# Altium PCB slave-14-mc33775.PcbDoc (part 4 of 5)
Units mil, origin at the board's own origin, x right, y up, seen from the top; angles counter-clockwise.
Board outline 6512.5 x 4562.01 mil, 6 copper layers (Top Copper, Supply, Signal Layer 1, Signal Layer 2, GND, Bot Copper), stack 69.773 mil thick; 427 components, 0 nets, 1131 pads, 1672 vias.
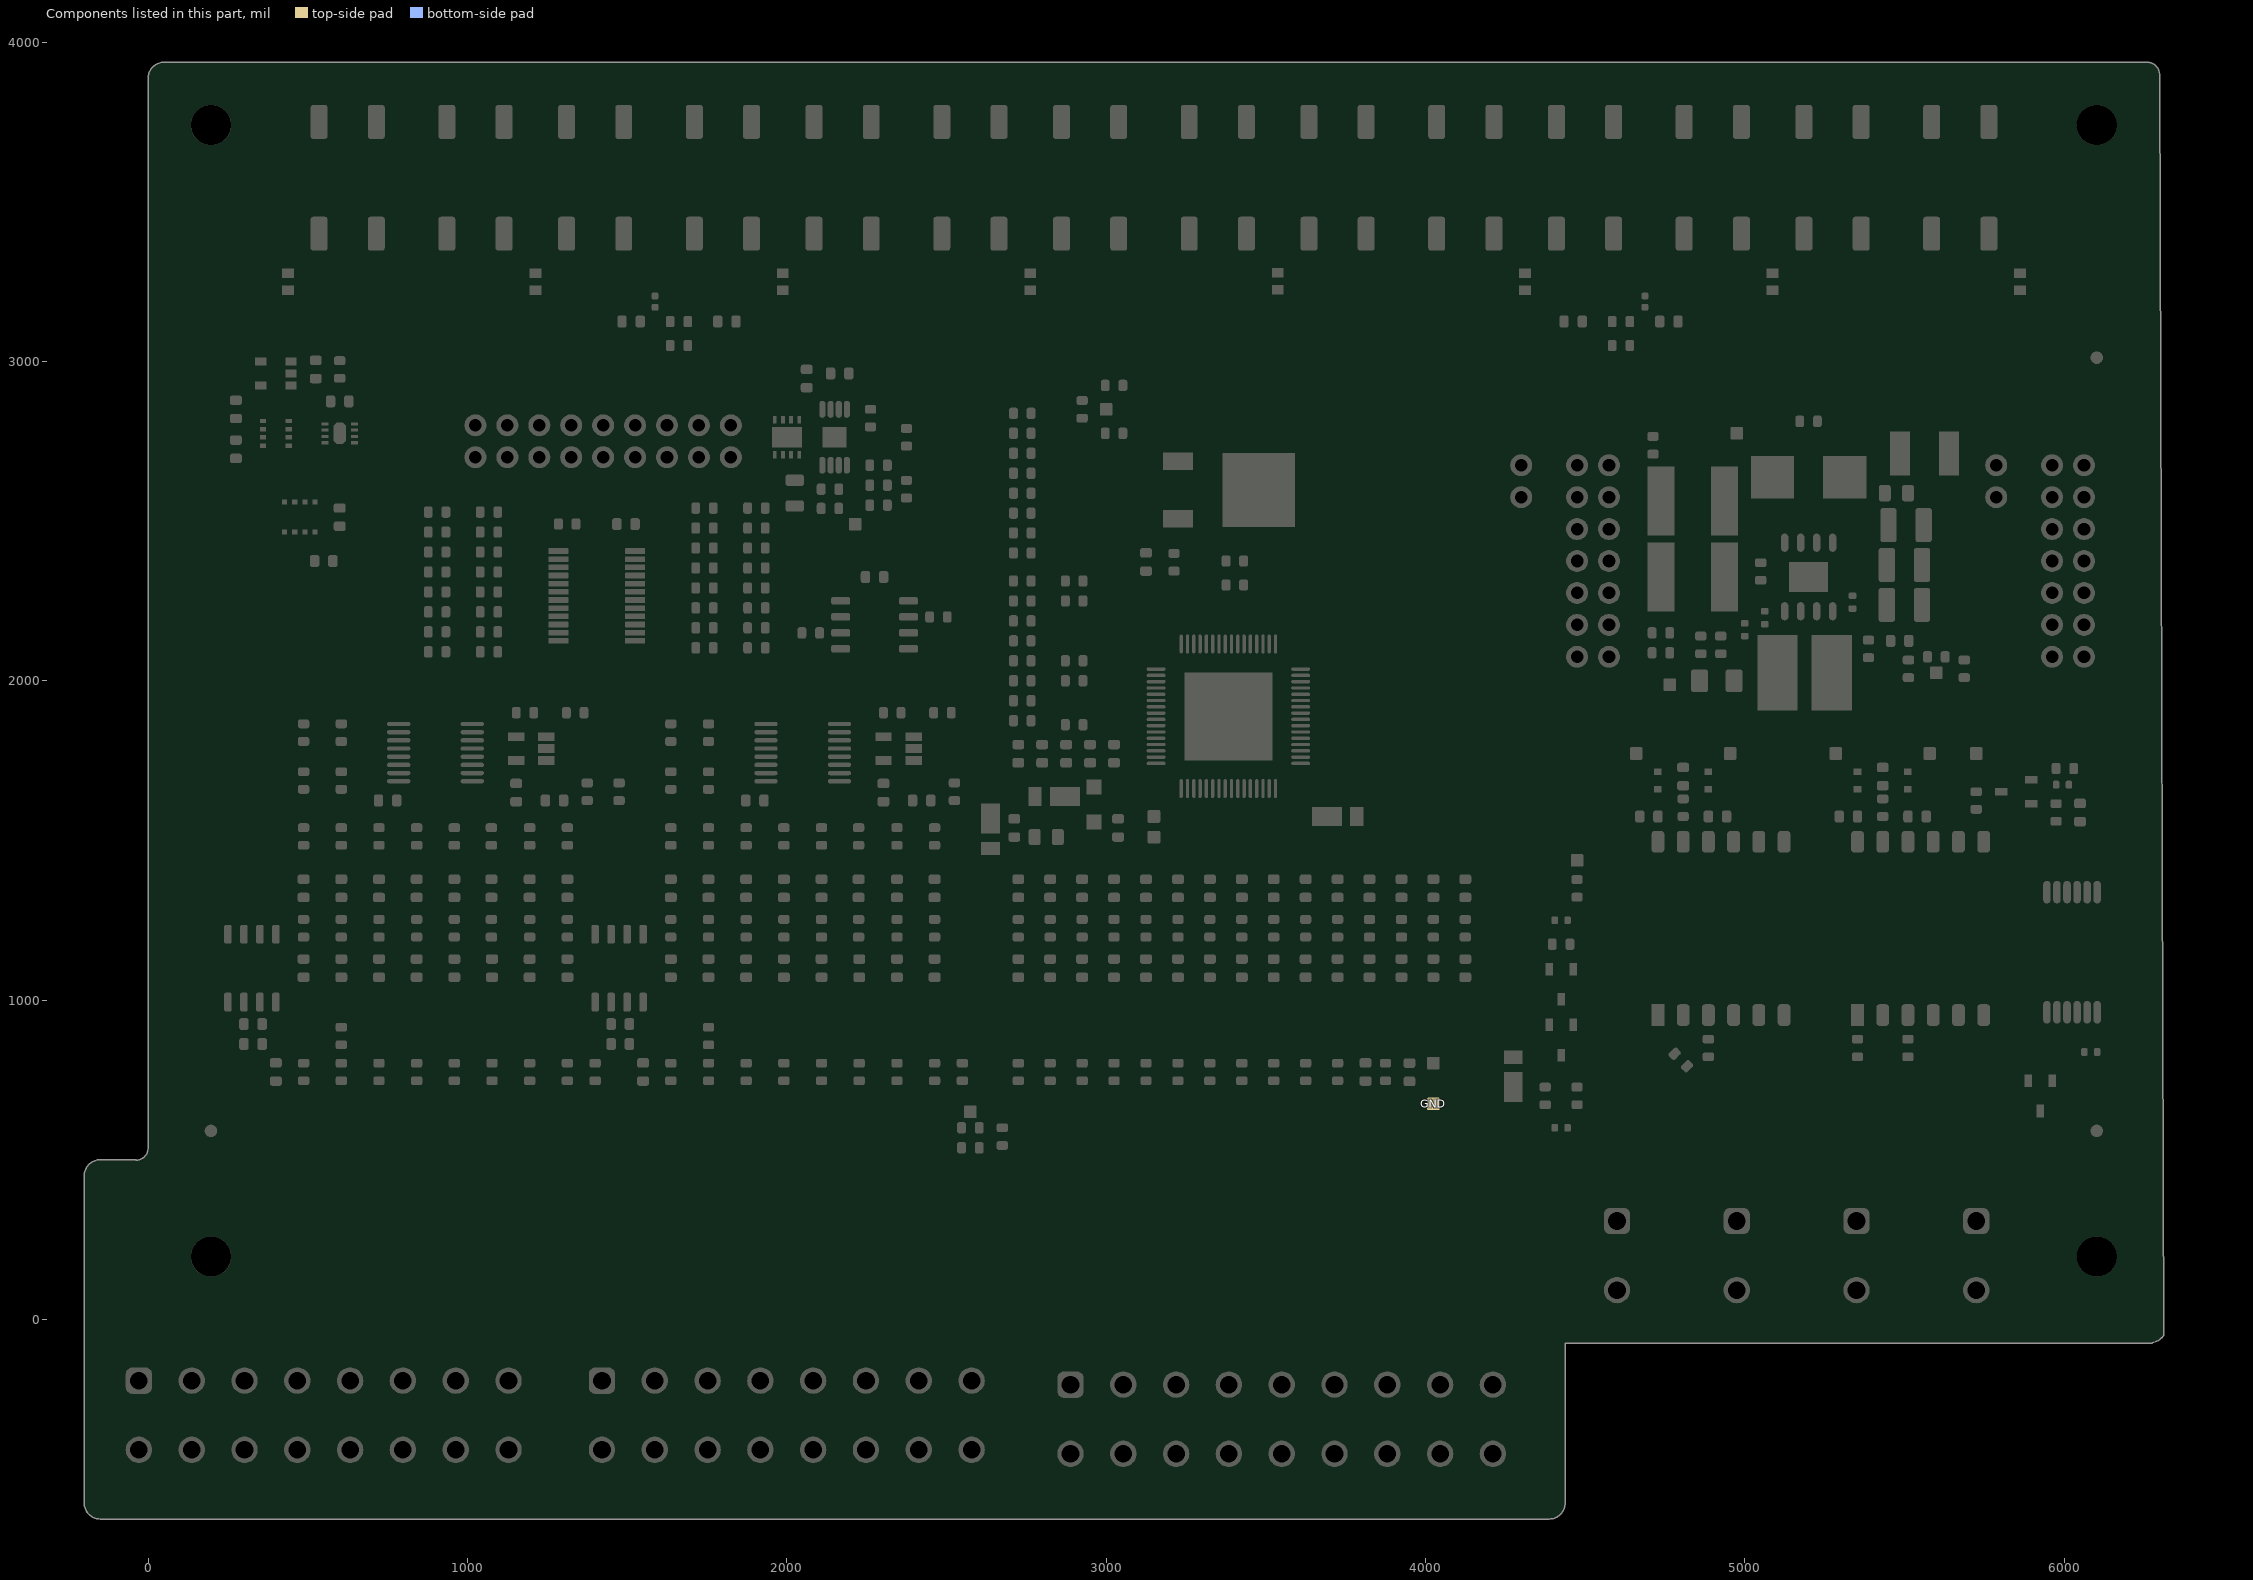
[diagram p8: the components of this part, seen from the top]

## Via types
v1: diameter 23.62, hole 15.75, Top Copper to Bot Copper, 1585 vias
v2: diameter 19.68, hole 11.81, Top Copper to Bot Copper, 87 vias

## Nets (pads, with @x,y where several pads share a name; then routed paths per layer and width w, separated by ;. In a path a pad name is that pad's centre, name@x,y a point inside that pad or via, vN(x,y) a via of type N, cw(c..) or ccw(c..) an arc to the next point about the centre after c; other vN are vias at no path point) (continued)
copper on no net: (continued)
  Signal Layer 1 w30: 750,3287.5 750,3250 v1(1012.5,2987.5) ; v1(2637.5,1412.5) 2637.5,-169.69 2888.58,-420.77 ; v1(2712.5,1637.5) 2713.52,1636.48 2726.92,1636.48 2747.31,1616.09 2747.31,1582.96 2741.27,1576.92 2741.27,1445.46 2775,1411.73 v1(2775,1162.5) 2775,886.52 v1(2825,836.52) 3055.76,605.76 3055.76,-120.72 3114.27,-179.24 3114.27,-418.95 3055.76,-418.95 3053.94,-420.77 ; v1(3025,836.52) 3025,828.56 3185.14,668.43 3274.85,668.43 3279.63,663.64 3279.63,-360.43 3219.29,-420.77 ; v1(3025,3125) 3090.19,3125 3254.58,2960.6 3876.9,2960.6 4008.55,2828.95 4008.55,2202.95 4091,2120.5 4091,1799.26 v1(4075,1783.26) ; v1(3075,3162.5) 3100.77,3162.5 3210.58,3052.69 3211.73,3052.69 3269.81,2994.6 3892.9,2994.6 4042.55,2844.95 4042.55,2217.03 4125,2134.58 v1(4125,1783.26) ; v1(3100,1575) 3222.31,1697.31 3222.31,2587.53 v1(3212.5,2597.34) ; v1(3225,836.52) 3444.98,616.53 3444.98,-360.43 3384.65,-420.77 ; v1(3225,3087.5) 3283.9,3028.6 3906.98,3028.6 4076.55,2859.03 4076.55,2231.12 4161.19,2146.48 4161.19,1802.82 4175,1789.01 v1(4175,1783.26) ; v1(3544.09,1957.78) 3600,1901.87 3600,1624.23 3490.19,1514.42 3490.19,1053.46 3425,988.27 v1(3425,836.52) 3498,763.52 3498,691.81 3557.4,632.4 3557.4,-126.3 3610.34,-179.24 3610.34,-413.36 3557.4,-413.36 3550,-420.77 ; v1(3544.09,2016.83) 3637.5,1923.43 3637.5,1761.7 3659.81,1739.39 3659.81,1023.08 3625,988.27 v1(3625,836.52) 3625,675 3681.25,618.75 3681.25,-153 3655.02,-179.24 3655.02,-264.57 3715.35,-324.91 3715.35,-420.77 ; v1(3737.5,2900) 3877.14,2760.36 v1(3877.14,1783.26) ; v1(3775,2075) v1(3775,988.04) 3775,659.22 3823.36,610.86 3820.37,607.87 3820.37,-360.43 3880.71,-420.77 ; v1(3850,2875) 3937.5,2787.5 v1(3937.5,1783.26) ; v1(3850,3300) 3850,3275 4178.55,2946.45 4178.55,2273.37 4263.19,2188.73 4263.19,1845.07 v1(4325,1783.26) ; v1(3862.5,2925) 3974.55,2812.95 3974.55,2179.49 4025,2129.04 v1(4025,1783.26) ; v1(3937.5,3087.5) 4110.55,2914.45 4110.55,2245.2 4195.19,2160.56 4195.19,1816.9 4225,1787.09 v1(4225,1783.26) ; v1(3937.5,3137.5) 4144.55,2930.45 4144.55,2259.28 4229.19,2174.64 4229.19,1830.99 4275,1785.18 v1(4275,1783.26) ; v1@3975,2125 3979.81,2120.19 3979.81,1014.8 3975,1009.99 v1(3975,988.04) 4037.5,925.54 4037.5,-127.46 3985.72,-179.24 3985.72,-412.21 4037.5,-412.21 4046.06,-420.77 ; v1(4050,3300) 4050,3125 4212.55,2962.45 4212.55,2287.45 4297.19,2202.81 4297.19,1862.99 4312.5,1847.68 4312.5,1845.76 v1(4375,1783.26) ; v1(4400,1937.5) 4400,2400 4475,2475 ; v1(4425,1783.26) 4331.19,1877.07 4331.19,2268.81 4246.55,2353.45 4246.55,2883.28 4575,3211.73 v1(4575,3300) ; v1(4481.99,1783.26) 4365.19,1900.06 4365.19,2653.46 4579.81,2868.08 4579.81,3104.81 v1(4775,3300) ; v1@4562.5,1787.5 4647.24,1872.24 4647.24,2234.74 5350,2937.5 v1(5350,3300) ; v1@4612.5,1787.5 4730.25,1905.25 4730.25,2229.48 5550,3049.23 v1(5550,3300) ; v1(4765.06,2037.5) 4765.06,2119.74 5157.82,2512.5 v1(5162.5,2512.5) ; v1(5475,2009.94) 5497.44,2009.94 5962.5,2475
  Signal Layer 2 w12: v1(512.5,2775) 513.31,2774.19 976.47,2774.19 995.11,2755.55 1469.45,2755.55 1525,2700 ; v1(725,2800) 1025.01,2800 ; v1(2625,1812.5) 2625.81,1811.69 3209.91,1811.69 3290.02,1731.58 3856.58,1731.58 3876.45,1751.45 4683.15,1751.45 4722.1,1712.5 v1(5725,1712.5) ; v1(2818.75,1937.5) 2833.72,1922.53 v1(3002.34,1922.53) ; v1(2818.75,2062.5) 2868.75,2012.5 2961.5,2012.5 2998.19,1975.81 v1(3037.5,1975.81) ; v1(3087.5,1648.19) 3199.13,1648.19 3214.75,1663.81 3922.94,1663.81 3978.58,1719.45 4137.54,1719.45 4191.66,1665.34 4687.81,1665.34 v1(4728.15,1625) ; v1(3087.5,1679.81) 3916.31,1679.81 3971.95,1735.45 4144.17,1735.45 4198.28,1681.34 4829.81,1681.34 v1(4886.15,1625) v1@4887.5,1625 ; v2(3193.36,1607.84) 3195.44,1607.84 3202.47,1600.81 3724.19,1600.81 3816.59,1508.41 4077.39,1508.41 4083.52,1514.55 5149.11,1514.55 5285.37,1650.81 5324.19,1650.81 5350,1625 v1(5353.15,1625) ; v2(3212.5,1627.84) 3728.47,1627.84 3825.76,1530.55 4068.41,1530.55 4074.41,1536.55 5136.55,1536.55 5272.81,1672.81 5333.31,1672.81 5339.31,1666.81 5469.34,1666.81 v1(5511.15,1625) ; 4475,2075 4538.31,2011.69 4775.75,2011.69 4789.87,2025.81 4967.97,2025.81 5009.65,1984.13 5485.69,1984.13 5576.56,2075 5962.5,2075 ; 4475,2175 4530.55,2230.55 4865.97,2230.55 4894.95,2259.53 5378.76,2259.53 5463.29,2175 5962.5,2175 ; 4475,2375 4519.45,2419.45 5918.05,2419.45 5962.5,2375 ; 4575,2075 4658.05,2075 4671.36,2061.69 4747.47,2061.69 4749.09,2063.31 4824.68,2063.31 4828.86,2059.13 4904.44,2059.13 4933.62,2088.31 4987.06,2088.31 4989.31,2086.06 5560.07,2086.06 5593.45,2119.45 6018.05,2119.45 6062.5,2075 ; 4575,2175 4833.05,2175 4901.58,2243.53 5342.97,2243.53 5435.69,2150.81 5835.88,2150.81 v1(5837.5,2149.19) ; 4575,2375 5088.5,2375 5101.81,2388.31 5610.69,2388.31 5674,2325 6012.5,2325 6062.5,2375 ; v1@4728.15,1625.81 v1@4728.96,1625
  Signal Layer 2 w15: v2(955.32,1787.8) 1085.25,1787.8 1085.54,1787.5 v2(1175,1787.5) ; v2(1075,1864.57) v2(1247.24,1864.57) ; v2(2105.32,1787.8) 2235.25,1787.8 2235.54,1787.5 v2(2325,1787.5) ; v2(2225,1864.57) v2(2397.24,1864.57)
  Signal Layer 2 w16: v1(400,2737.5) 400,2761.55 476.8,2838.34 665.17,2838.34 676.83,2850 v1(725,2850) ; v1(412.01,2400) 439.82,2372.19 586.56,2372.19 614.37,2400 733.34,2400 738.48,2394.86 749.96,2394.86 v1(792.13,2352.69) 832.32,2312.5 v1(1450,2312.5) ; v1(475,2400) 495.61,2420.61 495.61,2433.38 512.72,2450.48 761.52,2450.48 774.5,2437.5 v1(812.5,2437.5) 1350,2437.5 v1(1412.5,2375) ; v2(487.01,1762.5) 569.01,1762.5 646.33,1685.18 844.43,1685.18 v2(844.69,1685.43) ; v1(487.5,2712.5) v1(725,2712.5) ; v2(605,1763.06) 672.97,1763.06 v2(725,1711.02) ; v2(650,1800) 701.84,1800 714.3,1787.54 793.25,1787.54 v2(844.69,1838.98) ; v1(925,1900) 1363.62,1900 1391.72,1871.89 1784.39,1871.89 1809.89,1897.39 1953.19,1897.39 1963.08,1887.5 v1(2062.5,1887.5) ; v2(1075,1762.2) 1075.55,1761.66 1212.08,1761.66 1212.92,1762.5 v2(1350,1762.5) ; v1(1112.5,1937.5) 1756.54,1937.5 1769.04,1925 v1(2025,1925) ; v1(1199.19,2587.5) 1200.25,2588.56 2673.94,2588.56 v1(2675,2587.5) ; v1(1387.5,2525) 1431.06,2568.56 2631.44,2568.56 v1(2675,2525) ; v2(1625,2237.5) 1625,2274.17 1676.26,2325.44 1977.96,2325.44 2005.33,2352.81 2270.36,2352.81 2310.67,2312.5 v1(2675,2312.5) ; v2(1637.01,1762.5) 1719.01,1762.5 1796.33,1685.18 1994.43,1685.18 v2(1994.69,1685.43) ; v2(1755,1763.06) 1822.97,1763.06 v2(1875,1711.02) ; v2(1800,1800) 1851.84,1800 1864.3,1787.54 1943.25,1787.54 v2(1994.69,1838.98) ; v1(1900,2750) 1901.46,2748.54 1901.46,2735.98 1927.75,2709.69 2267.69,2709.69 2333,2775 v1(2675,2775) ; v1(1902.16,2260.11) 1903.62,2261.57 1911.57,2261.57 1912.5,2262.5 2098.17,2262.5 2113.48,2277.81 2498.04,2277.81 2525.85,2250 v1(2675,2250) ; v1(1950,2850.1) 1950.1,2850 2048.17,2850 2050.98,2852.81 2074.02,2852.81 2075.37,2851.46 2086.04,2851.46 v1(2087.5,2850) ; v1(2013.68,2675) 2125.25,2675 v1(2162.8,2637.45) ; v1(2025,2100) 2075,2150 v1(2437.5,2150) ; v1@2087.5,2062.5 2184.22,2062.5 2221.72,2100 v1(2475,2100) ; v1@2087.5,2062.53 v1(2089.22,2064.25) ; v1@2087.6,2850 2176.83,2850 2261.04,2765.79 2261.04,2761.5 v1(2262.5,2760.04) ; v1(2137.5,1987.5) 2212.5,2062.5 v1(2675,2062.5) ; v1(2200,1987.5) 2212.5,2000 v1(2675,2000) ; v2(2225,1762.2) 2225.55,1761.66 2362.08,1761.66 2362.92,1762.5 v2(2500,1762.5) ; v1(2250,1912.5) 2275,1937.5 v1(2675,1937.5) ; v1(2462.5,1862.47) 2475.03,1875 v1(2675,1875) ; v1(2625,2687.5) 2755.39,2687.5 2758.2,2684.69 3120.36,2684.69 3159.26,2723.59 4386.09,2723.59 v1(4412.5,2750) ; v1(2625,2740.31) 3147.7,2740.31 3157.39,2750 4362.5,2750 4372.19,2759.69 4374.02,2759.69 4401.83,2787.5 v1(4412.5,2787.5) ; v1(2675,2837.5) 2781.57,2837.5 2790.94,2846.87 2790.94,2849.02 2807.23,2865.31 2830.27,2865.31 2870.58,2825 4487.5,2825 v1(4537.5,2875) ; v1(2818.75,2312.5) 2987.5,2312.5 v1(3100,2200) ; v1(2818.75,2400) v1(3062.5,2400) ; v1(2818.75,2462.5) v1(3025,2462.5) ; v1(2818.75,2525) v1(2987.5,2525) ; v1(2818.75,2650) v1(2912.5,2650) ; v1(2818.75,2712.5) v1(2875,2712.5) ; v1(2837.5,1462.5) 2852.81,1447.19 4149.02,1447.19 4175,1473.17 v1(4175,1475) ; v1(2887.5,1475) v1(4137.5,1475) ; v1(2957.3,1415.92) 2958.76,1414.47 2973.03,1414.47 3009.94,1377.56 v1(4425,1377.56) ; v1(3337.5,2375) 3365.31,2402.81 4282.63,2402.81 4285.44,2400 v1(4287.5,2400) ; v1(3400,2450) v1(4325,2450) ; v1(3462.5,2375) 3508.95,2328.55 4638.99,2328.55 4647.94,2337.5 v1(4650,2337.5) ; 4387.5,2487.5 4421.45,2521.45 4528.55,2521.45 4575,2475 5164.33,2475 5192.14,2502.81 5545.36,2502.81 5610.72,2437.45 5925.51,2437.45 5934.4,2428.55 6016.05,2428.55 6062.5,2475 ; v1(4462.5,1562.5) v1(4600,1562.5) ; v1(4462.5,1600) 4643.75,1600 4668.75,1575 v1(4850,1575) ; 4475,2575 4521.45,2621.45 5666.05,2621.45 v1(5700,2587.5) ; 5937.5,2525 6012.5,2525 6062.5,2575
  Signal Layer 2 w24: v1(269.29,862.5) 329.35,802.44 1359.23,802.44 v1(1419.29,862.5) 1513.6,956.81 1673.2,956.81 1699.32,930.69 2535.94,930.69 2550,944.75 v1(2550,950) ; v1(400,715.75) 400.49,716.24 840.98,716.24 1195,716.24 1312.5,716.24 v1(1312.99,716.73) ; v1(900,2912.5) 912.5,2925 2804.52,2925 2854.52,2875 3687.5,2875 v1(3700,2862.5) ; v1@1313.48,716.24 v1(1312.99,716.73) ; v1(1400,716.73) v1(1312.99,716.73) ; v1@1475,800 1475,725 1516.06,683.94 2475.18,683.94 2507.98,716.73 v1(2575,716.73) ; v1@1549.51,716.24 v1(1550,715.75) 1550.49,716.24 1990.98,716.24 2462.5,716.24 v1(2462.99,716.73) ; v1(1750,3050) v1(2575,3050) v1(4525,3050) ; v1(1988.09,2887.5) v1(2137.5,2887.5) ; v1(3678.45,1888.09) 3702.84,1863.7 3714.28,1863.7 ; 3700,1992.8 3712.15,1992.8 3715.15,1995.8 3733.3,1995.8 3737.5,2000 ; v1(3700,2787.5) v1(4362.5,2787.5) ; 4575,2575 4842.51,2575 4861.82,2594.31 5487.8,2594.31 5557.56,2524.55 5937.05,2524.55 5937.5,2525 ; v1(5025,2175) 5375,2175 v1(5387.5,2162.5)
  Signal Layer 2 w30: v1(900,3300) 1181,3019 1731.77,3019 1735.58,3015.19 2589.42,3015.19 2593.23,3019 3706,3019 v1(3850,2875) ; v1(1525,3300) 1704.42,3120.58 1704.42,3110.58 1724.81,3090.19 1886.64,3090.19 1921.45,3125 v1(1962.5,3125) ; v1(1725,3300) 1725,3262.5 1775,3212.5 2289.42,3212.5 2376.92,3125 v1(3025,3125) ; v1(2250,3300) 2387.5,3162.5 v1(3075,3162.5) ; v1(2500,3300) 2500,3275 2562.5,3212.5 3100,3212.5 v1(3225,3087.5) ; v1(2775,1162.5) v1(3375,1162.5) ; v1(2776.08,1557.38) v1(2913.04,1557.38) 3082.38,1557.38 v1(3100,1575) v1(3600,1575) ; v1(3025,836.52) 3125.98,937.5 v1(3462.5,937.5) ; v1(3075,3300) 3287.5,3087.5 v1(3937.5,3087.5) ; v1(3212.5,2597.34) 3215.16,2597.34 3237.5,2575 4300,2575 4300,2575.59 4536.91,2812.5 v1(4712.5,2812.5) 5550,2812.5 5787.5,2575 ; v1(3225,836.52) 3288.48,900 v1(3562.5,900) ; v1(3275,3300) 3437.5,3137.5 v1(3937.5,3137.5) ; v1(3341.61,2300) 3379.11,2262.5 v1(4287.5,2262.5) ; v1(3450,2225) 4063.27,2225 4385.58,1902.69 4497.31,1902.69 v1@4612.5,1787.5 ; v1(3451.87,2050) 3526.87,2125 v1(3979.81,2125) ; v1(3500,2175) 4065.19,2175 4371.5,1868.69 4396.56,1868.69 v1(4481.99,1783.26) ; v1(3510.93,2050) 3535.93,2075 v1(3775,2075) ; v1(3637.5,2487.5) 4387.5,2487.5 ; v1(3678.45,1769.98) 3691.85,1756.58 3846.22,1756.58 v1@3875.02,1785.38 ; v1(3678.45,2006.2) 3691.85,1992.8 3700,1992.8 ; v1(3710.19,1791.39) 3831.8,1791.39 3865.41,1825 3920.76,1825 3937.5,1808.26 v1(3937.5,1783.26) ; v1(3710.19,1828.89) 3821.22,1828.89 3852.14,1859.81 4007.43,1859.81 4025,1842.24 v1(4025,1783.26) v1@4025,1782.45 ; v1(3710.19,1909.5) 3805.66,1909.5 3823.98,1927.81 4069.5,1927.81 4175,1822.31 v1(4175,1783.26) ; v1(3710.19,1947) 3725,1961.81 4083.59,1961.81 4225,1820.4 v1(4225,1783.26) ; v1(3710.19,2027.61) 3716.58,2034 4124.26,2034 v1(4375,1783.26) ; 3714.28,1863.7 3807.95,1863.7 3838.06,1893.81 4055.42,1893.81 4125,1824.23 v1(4125,1783.26) ; 3737.5,2000 4108.26,2000 v1(4325,1783.26) ; v1(4400,1937.5) v1(4966.63,1937.5) ; v1(4893.75,2084.94) 4959.81,2151 4959.81,2159.04 5018.49,2217.72 v1(5093.75,2217.72) ; v1(4966.63,2062.5) 5019.19,2009.94 v1(5475,2009.94)
  Supply w12: v2(521.46,2422.67) v1(750,2422.67)
  Supply w24: v1(2262.5,2760.04) 2262.5,2762.5 2369.31,2869.31 2850.24,2869.31 2944.55,2775 ; v1(3080.45,2925) 3080.45,2905.45 2950,2775 2944.55,2775 ; v1(3341.61,2300) 3086.77,2554.84 3086.77,2632.78 2944.55,2775
  GND w24: 4200,2675 4300,2675 ; 5687.5,2675 5787.5,2675
  Bot Copper w6: -28.74,-191.73 136.61,-191.73 301.97,-191.73 467.32,-191.73 632.68,-191.73 798.03,-191.73 963.39,-191.73 1128.74,-191.73 1421.26,-191.73 1586.61,-191.73 1751.97,-191.73 1917.32,-191.73 2082.68,-191.73 2248.03,-191.73 2413.39,-191.73 2578.74,-191.73 2578.74,417.91 v1(2675,514.17) ; 4211.42,-420.77 4413.8,-218.38 4413.8,1.59 4425,12.79 v1(4425,793.8)
  Bot Copper w16: v1(2725,836.52) 2799.51,762.01 ; v1(2837.5,1462.5) 2837.5,1711.08 2865.31,1738.89 2865.31,1917.14 2960.67,2012.5 v1(3000,2012.5) ; v1(2887.5,1475) 2875,1487.5 2875,1669.92 2922.19,1717.11 2922.19,1934.69 v1(2962.5,1975) ; v1(3072.19,2087.5) 3072.19,2286.52 3250.98,2465.31 3384.69,2465.31 v1(3400,2450) ; v1(3100,2275) 3100,2276.83 3198.17,2375 v1(3337.5,2375) ; v1(4137.5,1562.5) v1(4462.5,1562.5) ; v1(4175,1600) v1(4462.5,1600) ; v1(4287.5,2400) 4287.5,2362.5 4475,2175 ; v1(4325,2450) 4325,2359.31 4462.86,2221.45 4528.55,2221.45 4575,2175 ; v1(4412.5,2750) 4465.69,2750 4521.45,2694.24 4521.45,2321.45 4475,2275 ; v1(4412.5,2787.5) 4528.19,2787.5 4621.45,2694.24 4621.45,2321.45 4575,2275 ; v1(4600,1562.5) 4615.31,1547.19 5009.69,1547.19 5290.72,1828.22 5815.72,1828.22 6062.5,2075 ; v1(4850,1575) 5009.22,1575 5282.43,1848.22 5735.72,1848.22 5962.5,2075
  Bot Copper w24: v1(750,2525) 750,2552.98 900,2702.98 v1(900,2912.5)
  Bot Copper w30: v1(450,3500) 419.66,3500 384.83,3465.17 359.83,3440.17 334.83,3415.17 309.83,3390.17 284.83,3365.17 259.83,3340.17 234.83,3315.17 209.83,3290.17 162.61,3242.96 162.61,1022.41 426.95,758.07 2997.91,758.07 3050,705.98 3050,-200 ; 1200,3437.5 1200,3400 1200,3103.15 971.56,2874.71 971.56,2677.86 1027.11,2622.31 1213.61,2622.31 1305.15,2530.77 1305.15,2408.12 1748.08,1965.19 1914.92,1965.19 2072.47,1807.64 2072.47,1678 2290.66,1459.81 2539.42,1459.81 2690.19,1309.04 2690.19,1023.08 2876.75,836.52 v1(2925,836.52) 2969.45,792.07 3081.91,792.07 3385.98,487.99 3385.98,-37.54 3219.29,-204.23 ; 1962.5,3375 1962.5,3362.5 1975,3350 1975,3186.73 1927.69,3139.42 1927.69,2997.13 1975.66,2949.16 1975.66,2924.3 1945.77,2894.41 1945.08,2894.41 1878.45,2827.78 1878.45,2777.86 1865.19,2764.6 1865.19,2735.58 1878.45,2722.32 1878.45,2677.86 1867.35,2666.76 1867.35,2070.92 1973.08,1965.19 2034.04,1965.19 2138.16,1861.07 2138.16,1751.42 2211.4,1678.18 2260.62,1678.18 2310.19,1628.61 2310.19,1560.29 2376.66,1493.81 2605.42,1493.81 2690.19,1409.04 2690.19,1398.08 2809.81,1278.46 2809.81,1103.46 3076.75,836.52 v1(3125,836.52) 3155.49,836.52 3504.02,487.99 3504.02,-84.86 3384.65,-204.23 ; 2775,3487.5 2759.81,3472.31 2759.81,3450 2759.81,3350 2759.81,1599.75 2741.27,1581.21 2741.27,1447 2843.81,1344.46 2843.81,1269.46 3110.58,1002.69 3158.83,1002.69 v1(3325,836.52) 3325,785 3480,630 3482.5,630 3550,562.5 3550,-204.23 ; v1(3375,1162.5) 3375,1498.08 3544.09,1667.18 v1(3544.09,1780.61) ; v1(3462.5,937.5) 3462.5,1537.5 3587.5,1662.5 3587.5,1796.26 v1(3544.09,1839.67) ; v1(3537.5,3300) 3537.5,2263.27 3745,2055.77 3745,1544.52 3690.19,1489.71 3690.19,978.46 3576.92,865.19 3553.67,865.19 v1(3525,836.52) 3525,702.99 3715.35,512.64 3715.35,-204.23 ; v1(3544.09,1898.72) 3576.28,1898.72 3637.5,1837.5 3637.5,1661.73 3562.5,1586.73 v1(3562.5,900) ; 3880.71,-204.23 3857.99,-181.52 3857.99,487.99 3725,620.98 v1(3725,836.52) 3725,988.27 3790.19,1053.46 3790.19,2040.96 4018.75,2269.52 4018.75,3006.25 v1(4312.5,3300) ; 4046.06,-204.23 4046.06,816.98 v1(3875,988.04) 3875,1313.27 3990.19,1428.46 3990.19,2086.15 4212.5,2308.46 4212.5,2725 4452.02,2964.52 4752.02,2964.52 v1(5087.5,3300) ; 4211.42,-204.23 4211.42,604.92 4240.19,633.69 4240.19,1302.69 4465.19,1527.69 4476.92,1527.69 4497.31,1548.08 4497.31,1572.31 4897.31,1972.31 5486.6,1972.31 5850,2335.71 v1(5850,3300)
  other v1: 487.01,716.73 722.99,716.73 840.98,716.73 959.02,716.73 1077.01,716.73 1195,716.73 1637.01,716.73 1872.99,716.73 1990.98,716.73 2109.02,716.73 2227.01,716.73 2345,716.73 1475,802.56 400,834.25 1550,834.25 387.8,862.5 1537.8,862.5 387.8,925 1537.8,925 430.71,993.7 1580.71,993.7 487.01,1159.25 605,1159.25 722.99,1159.25 840.98,1159.25 959.02,1159.25 1077.01,1159.25 1195,1159.25 1312.99,1159.25 1637.01,1159.25 1755,1159.25 1872.99,1159.25 1990.98,1159.25 2109.02,1159.25 2227.01,1159.25 2345,1159.25 2462.99,1159.25 487.01,1425 605,1425 722.99,1425 840.98,1425 959.02,1425 1075,1425 1195,1425 1312.99,1425 1637.01,1425 1755,1425 1872.99,1425 1990.98,1425 2109.02,1425 2225,1425 2345,1425 2462.99,1425 1118.11,1621.46 2268.11,1621.46 487.01,1625.3 605,1625.3 686.81,1625 813.19,1625 1637.01,1625.3 1755,1625.3 1836.81,1625 1963.19,1625 3025,1667.62 1187.4,1678.54 2337.4,1678.54 2875,1709.25 3025,1709.25 4562.5,1783.26 4612.5,1783.26 487.01,1899.7 605,1899.7 1637.01,1899.7 1755,1899.7 5725,2009.94 3333.76,2050 5112.5,2287.5 5112.5,2325 5112.5,2362.5 5287.5,2362.5 1939.27,2737.5 2062.5,2737.5 2100,2737.5 2200,2737.5 1939.27,2762.5 2062.5,2762.5 2100,2762.5 2200,2762.5 1939.27,2787.5 2062.5,2787.5 2100,2787.5 2200,2787.5 50,3300 100,3300 150,3300 200,3300 250,3300 300,3300 350,3300 400,3300 450,3300 500,3300 550,3300 600,3300 650,3300 700,3300 750,3300 800,3300 850,3300 950,3300 1000,3300 1050,3300 1090.62,3300 1131.25,3300 1171.87,3300 1212.5,3300 1253.12,3300 1293.75,3300 1334.37,3300 1375,3300 1425,3300 1475,3300 1575,3300 1625,3300 1675,3300 1775,3300 1825,3300 1865.62,3300 1906.25,3300 1946.87,3300 1987.5,3300 2028.12,3300 2068.75,3300 2109.37,3300 2150,3300 2200,3300 2300,3300 2350,3300 2400,3300 2450,3300 2550,3300 2600,3300 2640.62,3300 2681.25,3300 2721.87,3300 2762.5,3300 2803.12,3300 2843.75,3300 2884.37,3300 2925,3300 2975,3300 3025,3300 3125,3300 3175,3300 3225,3300 3325,3300 3375,3300 3415.62,3300 3456.25,3300 3496.87,3300 3578.12,3300 3618.75,3300 3659.37,3300 3700,3300 3750,3300 3800,3300 3900,3300 3950,3300 4000,3300 4100,3300 4150,3300 4190.62,3300 4231.25,3300 4271.87,3300 4353.12,3300 4393.75,3300 4434.37,3300 4475,3300 4525,3300 4625,3300 4675,3300 4725,3300 4825,3300 4875,3300 4925,3300 4965.62,3300 5006.25,3300 5046.87,3300 5128.12,3300 5168.75,3300 5209.37,3300 5250,3300 5300,3300 5400,3300 5450,3300 5500,3300 5600,3300 5650,3300 5700,3300 5750,3300 5800,3300 5900,3300 5950,3300 6000,3300 6050,3300 6100,3300 6150,3300 6200,3300 50,3350 100,3350 150,3350 200,3350 250,3350 300,3350 350,3350 400,3350 450,3350 800,3350 850,3350 1171.87,3350 1212.5,3350 1253.12,3350 1575,3350 1625,3350 1946.87,3350 1987.5,3350 2028.12,3350 2350,3350 2400,3350 2721.87,3350 2762.5,3350 2803.12,3350 3125,3350 3175,3350 3496.87,3350 3537.5,3350 3578.12,3350 3900,3350 3950,3350 4271.87,3350 4312.5,3350 4353.12,3350 4675,3350 4725,3350 5046.87,3350 5087.5,3350 5128.12,3350 5450,3350 5500,3350 5850,3350 5900,3350 5950,3350 6000,3350 6050,3350 6100,3350 6150,3350 6200,3350 6250,3350 50,3400 100,3400 150,3400 200,3400 250,3400 300,3400 350,3400 400,3400 450,3400 800,3400 850,3400 1171.87,3400 1212.5,3400 1253.12,3400 1575,3400 1625,3400 1946.87,3400 1987.5,3400 2028.12,3400 2350,3400 2400,3400 2721.87,3400 2762.5,3400 2803.12,3400 3125,3400 3175,3400 3496.87,3400 3537.5,3400 3578.12,3400 3900,3400 3950,3400 4271.87,3400 4312.5,3400 4353.12,3400 4675,3400 4725,3400 5046.87,3400 5087.5,3400 5128.12,3400 5450,3400 5500,3400 5850,3400 5900,3400 5950,3400 6000,3400 6050,3400 6100,3400 6150,3400 6200,3400 6250,3400 50,3450 350,3450 400,3450 450,3450 800,3450 850,3450 1171.87,3450 1212.5,3450 1253.12,3450 1575,3450 1625,3450 1946.87,3450 1987.5,3450 2028.12,3450 2350,3450 2400,3450 2721.87,3450 2762.5,3450 2803.12,3450 3125,3450 3175,3450 3496.87,3450 3537.5,3450 3578.12,3450 3900,3450 3950,3450 4271.87,3450 4312.5,3450 4353.12,3450 4675,3450 4725,3450 5046.87,3450 5087.5,3450 5128.12,3450 5450,3450 5500,3450 5850,3450 5900,3450 5950,3450 6250,3450 500,3500 550,3500 600,3500 650,3500 700,3500 750,3500 800,3500 850,3500 900,3500 950,3500 1000,3500 1050,3500 1090.62,3500 1131.25,3500 1171.87,3500 1212.5,3500 1253.12,3500 1293.75,3500 1334.37,3500 1375,3500 1425,3500 1475,3500 1525,3500 1575,3500 1625,3500 1675,3500 1725,3500 1775,3500 1825,3500 1865.62,3500 1906.25,3500 1946.87,3500 1987.5,3500 2028.12,3500 2068.75,3500 2109.37,3500 2150,3500 2200,3500 2250,3500 2300,3500 2350,3500 2400,3500 2450,3500 2500,3500 2550,3500 2600,3500 2640.62,3500 2681.25,3500 2721.87,3500 2762.5,3500 2803.12,3500 2843.75,3500 2884.37,3500 2925,3500 2975,3500 3025,3500 3075,3500 3125,3500 3175,3500 3225,3500 3275,3500 3325,3500 3375,3500 3415.62,3500 3456.25,3500 3496.87,3500 3537.5,3500 3578.12,3500 3618.75,3500 3659.37,3500 3700,3500 3750,3500 3800,3500 3850,3500 3900,3500 3950,3500 4000,3500 4050,3500 4100,3500 4150,3500 4190.62,3500 4231.25,3500 4271.87,3500 4312.5,3500 4353.12,3500 4393.75,3500 4434.37,3500 4475,3500 4525,3500 4575,3500 4625,3500 4675,3500 4725,3500 4775,3500 4825,3500 4875,3500 4925,3500 4965.62,3500 5006.25,3500 5046.87,3500 5087.5,3500 5128.12,3500 5168.75,3500 5209.37,3500 5250,3500 5300,3500 5350,3500 5400,3500 5450,3500 5500,3500 5550,3500 5600,3500 5650,3500 5700,3500 5750,3500 5800,3500 5850,3500 500,3550 550,3550 600,3550 650,3550 700,3550 750,3550 800,3550 850,3550 900,3550 950,3550 1000,3550 1050,3550 1090.62,3550 1131.25,3550 1171.87,3550 1212.5,3550 1253.12,3550 1293.75,3550 1334.37,3550 1375,3550 1425,3550 1475,3550 1525,3550 1575,3550 1625,3550 1675,3550 1725,3550 1775,3550 1825,3550 1865.62,3550 1906.25,3550 1946.87,3550 1987.5,3550 2028.12,3550 2068.75,3550 2109.37,3550 2150,3550 2200,3550 2250,3550 2300,3550 2350,3550 2400,3550 2450,3550 2500,3550 2550,3550 2600,3550 2640.62,3550 2681.25,3550 2721.87,3550 2762.5,3550 2803.12,3550 2843.75,3550 2884.37,3550 2925,3550 2975,3550 3025,3550 3075,3550 3125,3550 3175,3550 3225,3550 3275,3550 3325,3550 3375,3550 3415.62,3550 3456.25,3550 3496.87,3550 3537.5,3550 3578.12,3550 3618.75,3550 3659.37,3550 3700,3550 3750,3550 3800,3550 3850,3550 3900,3550 3950,3550 4000,3550 4050,3550 4100,3550 4150,3550 4190.62,3550 4231.25,3550 4271.87,3550 4312.5,3550 4353.12,3550 4393.75,3550 4434.37,3550 4475,3550 4525,3550 4575,3550 4625,3550 4675,3550 4725,3550 4775,3550 4825,3550 4875,3550 4925,3550 4965.62,3550 5006.25,3550 5046.87,3550 5087.5,3550 5128.12,3550 5168.75,3550 5209.37,3550 5250,3550 5300,3550 5350,3550 5400,3550 5450,3550 5500,3550 5550,3550 5600,3550 5650,3550 5700,3550 5750,3550 5800,3550 500,3600 550,3600 600,3600 650,3600 700,3600 750,3600 800,3600 850,3600 900,3600 950,3600 1000,3600 1050,3600 1090.62,3600 1131.25,3600 1171.87,3600 1212.5,3600 1253.12,3600 1293.75,3600 1334.37,3600 1375,3600 1425,3600 1475,3600 1525,3600 1575,3600 1625,3600 1675,3600 1725,3600 1775,3600 1825,3600 1865.62,3600 1906.25,3600 1946.87,3600 1987.5,3600 2028.12,3600 2068.75,3600 2109.37,3600 2150,3600 2200,3600 2250,3600 2300,3600 2350,3600 2400,3600 2450,3600 2500,3600 2550,3600 2600,3600 2640.62,3600 2681.25,3600 2721.87,3600 2762.5,3600 2803.12,3600 2843.75,3600 2884.37,3600 2925,3600 2975,3600 3025,3600 3075,3600 3125,3600 3175,3600 3225,3600 3275,3600 3325,3600 3375,3600 3415.62,3600 3456.25,3600 3496.87,3600 3537.5,3600 3578.12,3600 3618.75,3600 3659.37,3600 3700,3600 3750,3600 3800,3600 3850,3600 3900,3600 3950,3600 4000,3600 4050,3600 4100,3600 4150,3600 4190.62,3600 4231.25,3600 4271.87,3600 4312.5,3600 4353.12,3600 4393.75,3600 4434.37,3600 4475,3600 4525,3600 4575,3600 4625,3600 4675,3600 4725,3600 4775,3600 4825,3600 4875,3600 4925,3600 4965.62,3600 5006.25,3600 5046.87,3600 5087.5,3600 5128.12,3600 5168.75,3600 5209.37,3600 5250,3600 5300,3600 5350,3600 5400,3600 5450,3600 5500,3600 5550,3600 5600,3600 5650,3600 5700,3600 5750,3600 5800,3600 550,3650 600,3650 650,3650 700,3650 750,3650 800,3650 850,3650 900,3650 950,3650 1000,3650 1050,3650 1090.62,3650 1131.25,3650 1171.87,3650 1212.5,3650 1253.12,3650 1293.75,3650 1334.37,3650 1375,3650 1425,3650 1475,3650 1525,3650 1575,3650 1625,3650 1675,3650 1725,3650 1775,3650 1825,3650 1865.62,3650 1906.25,3650 1946.87,3650 1987.5,3650 2028.12,3650 2068.75,3650 2109.37,3650 2150,3650 2200,3650 2250,3650 2300,3650 2350,3650 2400,3650 2450,3650 2500,3650 2550,3650 2600,3650 2640.62,3650 2681.25,3650 2721.87,3650 2762.5,3650 2803.12,3650 2843.75,3650 2884.37,3650 2925,3650 2975,3650 3025,3650 3075,3650 3125,3650 3175,3650 3225,3650 3275,3650 3325,3650 3375,3650 3415.62,3650 3456.25,3650 3496.87,3650 3537.5,3650 3578.12,3650 3618.75,3650 3659.37,3650 3700,3650 3750,3650 3800,3650 3850,3650 3900,3650 3950,3650 4000,3650 4050,3650 4100,3650 4150,3650 4190.62,3650 4231.25,3650 4271.87,3650 4312.5,3650 4353.12,3650 4393.75,3650 4434.37,3650 4475,3650 4525,3650 4575,3650 4625,3650 4675,3650 4725,3650 4775,3650 4825,3650 4875,3650 4925,3650 4965.62,3650 5006.25,3650 5046.87,3650 5087.5,3650 5128.12,3650 5168.75,3650 5209.37,3650 5250,3650 5300,3650 5350,3650 5400,3650 5450,3650 5500,3650 5550,3650 5600,3650 5650,3650 5700,3650 5750,3650 800,3700 850,3700 1171.87,3700 1212.5,3700 1253.12,3700 1575,3700 1625,3700 1946.87,3700 1987.5,3700 2028.12,3700 2350,3700 2400,3700 2721.87,3700 2762.5,3700 2803.12,3700 3125,3700 3175,3700 3496.87,3700 3537.5,3700 3578.12,3700 3900,3700 3950,3700 4271.87,3700 4312.5,3700 4353.12,3700 4675,3700 4725,3700 5046.87,3700 5087.5,3700 5128.12,3700 5450,3700 5500,3700 800,3750 850,3750 1171.87,3750 1212.5,3750 1253.12,3750 1575,3750 1625,3750 1946.87,3750 1987.5,3750 2028.12,3750 2350,3750 2400,3750 2721.87,3750 2762.5,3750 2803.12,3750 3125,3750 3175,3750 3496.87,3750 3537.5,3750 3578.12,3750 3900,3750 3950,3750 4271.87,3750 4312.5,3750 4353.12,3750 4675,3750 4725,3750 5046.87,3750 5087.5,3750 5128.12,3750 5450,3750 5500,3750 800,3800 850,3800 1171.87,3800 1212.5,3800 1253.12,3800 1575,3800 1625,3800 1946.87,3800 1987.5,3800 2028.12,3800 2350,3800 2400,3800 2721.87,3800 2762.5,3800 2803.12,3800 3125,3800 3175,3800 3496.87,3800 3537.5,3800 3578.12,3800 3900,3800 3950,3800 4271.87,3800 4312.5,3800 4353.12,3800 4675,3800 4725,3800 5046.87,3800 5087.5,3800 5128.12,3800 5450,3800 5500,3800 500,3850 550,3850 600,3850 650,3850 700,3850 750,3850 800,3850 850,3850 900,3850 950,3850 1000,3850 1050,3850 1090.62,3850 1131.25,3850 1171.87,3850 1212.5,3850 1253.12,3850 1293.75,3850 1334.37,3850 1375,3850 1425,3850 1475,3850 1525,3850 1575,3850 1625,3850 1675,3850 1725,3850 1775,3850 1825,3850 1865.62,3850 1906.25,3850 1946.87,3850 1987.5,3850 2028.12,3850 2068.75,3850 2109.37,3850 2150,3850 2200,3850 2250,3850 2300,3850 2350,3850 2400,3850 2450,3850 2500,3850 2550,3850 2600,3850 2640.62,3850 2681.25,3850 2721.87,3850 2762.5,3850 2803.12,3850 2843.75,3850 2884.37,3850 2925,3850 2975,3850 3025,3850 3075,3850 3125,3850 3175,3850 3225,3850 3275,3850 3325,3850 3375,3850 3415.62,3850 3456.25,3850 3496.87,3850 3537.5,3850 3578.12,3850 3618.75,3850 3659.37,3850 3700,3850 3750,3850 3800,3850 3850,3850 3900,3850 3950,3850 4000,3850 4050,3850 4100,3850 4150,3850 4190.62,3850 4231.25,3850 4271.87,3850 4312.5,3850 4353.12,3850 4393.75,3850 4434.37,3850 4475,3850 4525,3850 4575,3850 4625,3850 4675,3850 4725,3850 4775,3850 4825,3850 4875,3850 4925,3850 4965.62,3850 5006.25,3850 5046.87,3850 5087.5,3850 5128.12,3850 5168.75,3850 5209.37,3850 5250,3850 5300,3850 5350,3850 5400,3850 5450,3850 5500,3850 5550,3850 5600,3850 5650,3850 5700,3850 5750,3850 5800,3850 500,3900 550,3900 600,3900 650,3900 700,3900 750,3900 800,3900 850,3900 900,3900 950,3900 1000,3900 1050,3900 1090.62,3900 1131.25,3900 1171.87,3900 1212.5,3900 1253.12,3900 1293.75,3900 1334.37,3900 1375,3900 1425,3900 1475,3900 1525,3900 1575,3900 1625,3900 1675,3900 1725,3900 1775,3900 1825,3900 1865.62,3900 1906.25,3900 1946.87,3900 1987.5,3900 2028.12,3900 2068.75,3900 2109.37,3900 2150,3900 2200,3900 2250,3900 2300,3900 2350,3900 2400,3900 2450,3900 2500,3900 2550,3900 2600,3900 2640.62,3900 2681.25,3900 2721.87,3900 2762.5,3900 2803.12,3900 2843.75,3900 2884.37,3900 2925,3900 2975,3900 3025,3900 3075,3900 3125,3900 3175,3900 3225,3900 3275,3900 3325,3900 3375,3900 3415.62,3900 3456.25,3900 3496.87,3900 3537.5,3900 3578.12,3900 3618.75,3900 3659.37,3900 3700,3900 3750,3900 3800,3900 3850,3900 3900,3900 3950,3900 4000,3900 4050,3900 4100,3900 4150,3900 4190.62,3900 4231.25,3900 4271.87,3900 4312.5,3900 4353.12,3900 4393.75,3900 4434.37,3900 4475,3900 4525,3900 4575,3900 4625,3900 4675,3900 4725,3900 4775,3900 4825,3900 4875,3900 4925,3900 4965.62,3900 5006.25,3900 5046.87,3900 5087.5,3900 5128.12,3900 5168.75,3900 5209.37,3900 5250,3900 5300,3900 5350,3900 5400,3900 5450,3900 5500,3900 5550,3900 5600,3900 5650,3900 5700,3900 5750,3900 5800,3900
  other v2: 3274.7,1780.61 3318.01,1780.61 3361.32,1780.61 3404.63,1780.61 3447.93,1780.61 3491.24,1780.61 3274.7,1823.92 3318.01,1823.92 3361.32,1823.92 3404.63,1823.92 3447.93,1823.92 3491.24,1823.92 3274.7,1867.22 3318.01,1867.22 3361.32,1867.22 3404.63,1867.22 3447.93,1867.22 3491.24,1867.22 3274.7,1910.53 3318.01,1910.53 3361.32,1910.53 3404.63,1910.53 3447.93,1910.53 3491.24,1910.53 3274.7,1953.84 3318.01,1953.84 3361.32,1953.84 3404.63,1953.84 3447.93,1953.84 3491.24,1953.84 3274.7,1997.15 3318.01,1997.15 3361.32,1997.15 3404.63,1997.15 3447.93,1997.15 3491.24,1997.15

## Polygon pours and split planes (outlines as drawn)
no net on Top Overlay "Polygon_1_NoNet" (solid): 350,1361.5 189.5,1361.5 189.5,2074 350,2074
no net on Top Overlay "Polygon_23_NoNet" (solid): 5588.79,3019.28 5596.33,3017.7 5601.01,3015 5603.01,3012.86 5604.44,3010.24 5605.59,3003.78 5605.21,3000.08 5604.08,2996.81 5602.25,2993.99 5599.77,2991.64 5592.94,2988.41 5583.94,2987.29 5577.79,2987.61 5572.51,2988.76 5567.64,2990.89 5562.64,2994.3 5560.91,2995.51 5559.09,2996.06 5556.78,2995.15 5555.8,2992.8 5556.52,2990.91 5558.18,2989.32 5564.05,2985.49 5570.07,2983.04 5576.5,2981.75 5583.57,2981.37 5589.92,2981.77 5595.59,2982.95 5600.54,2984.88 5604.71,2987.5 5608.05,2990.77 5610.49,2994.65 5612,2999.08 5612.52,3004.02 5612.03,3008.75 5610.6,3013.04 5608.28,3016.79 5605.13,3019.91 5599.07,3023.24 5589.71,3025.31 5580.51,3026.67 5573.19,3028.43 5567.92,3031.52 5564.65,3035.94 5563.58,3042.05 5564.91,3048.88 5568.75,3054.05 5574.88,3057.34 5583.09,3058.5 5592.5,3057.38 5600.88,3053.12 5604.38,3051.54 5606.78,3052.58 5607.51,3054.52 5606.75,3056.38 5605,3057.89 5600.04,3060.82 5595.09,3062.79 5589.71,3063.9 5583.45,3064.25 5577.61,3063.85 5572.38,3062.68 5567.82,3060.77 5563.98,3058.18 5560.9,3054.94 5558.64,3051.1 5557.24,3046.71 5556.77,3041.83 5557.19,3037.32 5558.46,3033.3 5560.58,3029.78 5563.56,3026.79 5570.3,3022.87 5578.86,3020.76
no net on Top Overlay "Polygon_25_NoNet" (solid): 5411.06,2982.05 5425.29,2982.05 5430.88,2982.4 5435.78,2983.48 5440.09,2985.25 5443.75,2987.72 5446.7,2990.88 5448.87,2994.72 5450.22,2999.22 5450.68,3004.37 5449.68,3011.02 5446.79,3016.68 5442.16,3021.14 5436.37,3023.95 5441.55,3026.52 5445.78,3030.74 5448.44,3036.06 5449.37,3042.16 5448.88,3046.98 5447.48,3051.23 5445.24,3054.91 5442.25,3057.96 5438.6,3060.38 5434.36,3062.14 5424.51,3063.57 5397.03,3063.57 5395.43,3063.46 5393.88,3062.66 5393.04,3061.17 5392.92,3059.65 5392.92,2985.91 5393.04,2984.43 5393.88,2982.95 5395.42,2982.15 5396.96,2982.05 5411.06,2982.05 5411.96,2987.96 5399.94,2987.96 5399.83,3020.76 5411.83,3020.76 5411.51,3026.68 5399.83,3026.68 5399.83,3057.65 5423.75,3057.65 5431.01,3056.77 5436.96,3054.02 5439.23,3051.89 5440.96,3049.23 5442.06,3046 5442.45,3042.19 5442.06,3038.34 5440.96,3035.1 5439.23,3032.44 5436.96,3030.32 5431.01,3027.56 5423.77,3026.68 5411.51,3026.68 5411.83,3020.76 5424.7,3020.76 5432.56,3019.63 5438.56,3016.39 5442.4,3011.24 5443.76,3004.37 5442.4,2997.49 5438.56,2992.34 5432.56,2989.09 5424.73,2987.96 5411.96,2987.96
no net on Top Overlay "Polygon_24_NoNet" (solid): 5467.42,2986.05 5468.17,2982.8 5470.88,2981.57 5473.58,2982.8 5474.34,2986.06 5474.34,3047.53 5498.56,2996.96 5500.45,2994.13 5503.43,2993.08 5506.4,2994.13 5508.29,2996.96 5532.51,3047.53 5532.51,2986.06 5533.27,2982.8 5535.97,2981.57 5538.69,2982.8 5539.44,2986.06 5539.44,3059.6 5539.13,3061.72 5538.22,3063.07 5535.75,3064.03 5533.45,3063.42 5531.48,3060.72 5503.43,3001.37 5475.39,3060.72 5473.42,3063.42 5471.12,3064.03 5468.65,3063.07 5467.74,3061.72 5467.43,3059.6 5467.41,2986.77 5467.4,2986.25
no net on Top Overlay "Polygon_22_NoNet" (solid): 5660.93,3062.77 5664.56,3062.13 5667.31,3060.36 5669.08,3057.62 5669.71,3054.03 5669.71,2991.35 5669.08,2987.72 5667.31,2984.98 5664.56,2983.21 5660.93,2982.57 5653.92,2981.15 5648.14,2977.25 5644.24,2971.48 5642.81,2964.45 5642.81,2951.01 5642.05,2947.42 5640.08,2944.66 5637.28,2942.89 5634.07,2942.26 5388.97,2942.26 5388.16,2932.83 5634.09,2932.83 5637.72,2933.2 5641.12,2934.27 5644.21,2935.95 5646.9,2938.17 5649.13,2940.86 5650.8,2943.94 5651.86,2947.34 5652.24,2950.98 5652.23,2964.39 5652.87,2968.02 5654.64,2970.76 5657.38,2972.53 5661,2973.16 5664.63,2973.53 5668.02,2974.6 5671.11,2976.27 5673.8,2978.49 5676.02,2981.18 5677.69,2984.26 5678.76,2987.66 5679.13,2991.3 5679.13,3054.05 5678.77,3057.73 5677.73,3061.17 5676.08,3064.26 5673.88,3066.92 5671.2,3069.13 5668.11,3070.78 5664.68,3071.81 5661.02,3072.17 5657.39,3072.85 5654.64,3074.7 5652.87,3077.48 5652.24,3080.91 5652.24,3094.36 5651.87,3097.99 5650.8,3101.4 5649.13,3104.49 5646.9,3107.18 5644.21,3109.39 5641.12,3111.07 5637.72,3112.13 5634.09,3112.5 5140.91,3112.5 5136.76,3112.17 5133.11,3111.2 5129.99,3109.63 5127.41,3107.5 5125.39,3104.86 5123.93,3101.76 5123.05,3098.24 5122.75,3094.36 5122.75,2950.98 5123.12,2947.34 5124.18,2943.94 5125.87,2940.86 5128.09,2938.17 5130.78,2935.95 5133.86,2934.27 5137.27,2933.2 5140.91,2932.83 5388.16,2932.83 5388.97,2942.26 5140.95,2942.25 5137.33,2942.89 5134.58,2944.66 5132.81,2947.4 5132.17,2950.99 5132.17,3094.31 5132.81,3097.93 5134.58,3100.68 5137.33,3102.45 5140.91,3103.08 5634.03,3103.09 5637.66,3102.45 5640.41,3100.68 5642.18,3097.93 5642.81,3094.35 5642.81,3080.88 5644.24,3073.86 5648.14,3068.09 5653.92,3064.19
no net on Top Overlay "Polygon_28_NoNet" (solid): 5174.17,2956.09 5164.45,2957.53 5163.81,2958.58 5165.43,2968.86 5165.87,2969.53 5166.43,2969.69 5166.75,2969.64 5172.29,2968.71 5176.38,2969.28 5179.35,2971.06 5181.39,2974.23 5182.67,2978.99 5192.65,3038.95 5192.43,3039.75 5191.67,3040.1 5182.61,3040.1 5181.86,3040.44 5181.64,3041.24 5183.42,3051.53 5184.32,3052.3 5193.91,3052.3 5194.94,3053.17 5195.82,3058.27 5197.01,3063.38 5198.82,3067.8 5201.25,3071.54 5204.31,3074.6 5207.99,3076.96 5212.32,3078.65 5222.83,3079.98 5229.9,3079.3 5235.54,3077.8 5236.13,3076.77 5234.36,3066.62 5233.87,3065.95 5233.37,3065.82 5232.98,3065.89 5229.08,3066.96 5224.3,3067.49 5219.19,3066.91 5215.6,3065.08 5213.23,3061.79 5211.87,3056.81 5211.27,3053.46 5211.48,3052.65 5212.24,3052.3 5226.68,3052.3 5227.42,3051.95 5227.65,3051.15 5225.87,3040.86 5224.96,3040.1 5209.98,3040.1 5208.95,3039.22 5198.72,2977.53 5195.91,2968.21 5193.66,2964.52 5190.85,2961.49 5187.5,2959.13 5183.58,2957.44 5174.38,2956.09
no net on Top Overlay "Polygon_26_NoNet" (solid): 5351.1,2981.27 5345.55,2981.89 5341.12,2983.94 5337.48,2987.7 5334.25,2993.39 5328.67,3005.36 5327.82,3005.96 5327.83,3005.96 5326.99,3005.53 5310.11,2982.63 5309.37,2982.25 5294.05,2982.25 5293.16,2982.8 5293.27,2983.86 5320.73,3018.66 5320.87,3019.74 5313.81,3035.52 5310.87,3039.73 5307.54,3040.65 5304.01,3040.38 5303.94,3040.38 5303.14,3040.68 5302.9,3041.51 5304.52,3051.36 5305.08,3052.08 5312.67,3053.41 5317.93,3052.88 5321.97,3051.05 5325.17,3047.63 5327.94,3042.37 5332.64,3031.38 5333.5,3030.75 5333.49,3030.75 5334.35,3031.21 5348.55,3051.9 5349.3,3052.3 5364.63,3052.3 5365.52,3051.74 5365.42,3050.69 5340.15,3017.88 5340.05,3016.77 5348.94,2998.91 5352.04,2994.66 5355.37,2993.74 5359.99,2994.28 5360.11,2994.29 5360.91,2994.03 5361.2,2993.16 5359.56,2983.45 5359.02,2982.75 5355.33,2981.63 5351.29,2981.29
no net on Top Overlay "Polygon_27_NoNet" (solid): 5264.04,3041.33 5259.29,3040.62 5255.34,3038.57 5252.02,3035.39 5249.34,3031.3 5247.26,3026.46 5245.79,3021.13 5244.63,3009.69 5245.5,3002.72 5248.02,2997.54 5252,2994.31 5258.32,2993.26 5257.21,2981.13 5249.28,2981.84 5243.15,2983.83 5238.16,2986.89 5234.24,2990.8 5231.32,2995.34 5229.32,3000.31 5228.18,3005.49 5227.82,3010.66 5228.41,3018.59 5230.18,3026.29 5233.1,3033.51 5237.19,3039.99 5242.41,3045.47 5248.77,3049.71 5256.23,3052.45 5264.78,3053.41 5272.07,3052.7 5278.17,3050.72 5283.13,3047.68 5287.04,3043.79 5289.94,3039.26 5291.93,3034.32 5293.06,3029.16 5293.43,3024.01 5292.83,3016.06 5291.07,3008.34 5288.16,3001.1 5284.09,2994.6 5278.88,2989.09 5272.56,2984.84 5265.13,2982.1 5260.95,2981.4 5259.06,2981.14 5257.22,2981.14 5258.32,2993.26 5259.65,2993.36 5261.94,2993.91 5265.91,2995.97 5269.23,2999.15 5271.91,3003.23 5274,3008.07 5275.46,3013.41 5276.63,3024.85 5275.75,3031.82 5273.24,3037 5269.25,3040.22
no net on Top Copper "NONET_L01_P138" (solid, pour order 138): -37.5,3112.5 812.5,3112.5 812.5,2187.5 -50,2187.5
no net on Top Copper "VBAT_CON_EXT_L01_P148" (solid, remove dead copper, pour order 148): 2875,3112.5 2875,1925 4425,1925 4425,3112.5
no net on Top Copper "GND_L01_P147" (solid, remove dead copper, pour order 147): 4675,2825 5687.5,2825 5687.5,2075 5762.5,2000 5762.5,1950 4687.5,1950 4675,1937.5
no net on Top Copper "GND_L01_P139" (solid, remove dead copper, pour order 139): 1950,2950 2325,2950 2325,2412.5 2000,2412.5 2000,2612.5 1950,2662.5
no net on Top Copper "GND_L01_P001" (solid, pour order 1): 250,3250 250,3150 2950,3150 2950,3250
no net on Top Copper "GND_L01_P002" (solid, pour order 2): 3350,3250 3350,3150 6050,3150 6050,3250
no net on Top Copper "VBAT_CON_EXT_LIM_L01_P140" (solid, pour order 140): 4675,2725 4775,2725 4800,2700 4800,2200 4675,2200
no net on Top Copper "SW_L01_P145" (solid, pour order 145): 5212.5,2287.5 5212.5,1887.5 5387.5,1887.5 5412.5,1912.5 5412.5,2237.5 5362.5,2287.5
no net on Top Copper "+3.3V_L01_P146" (solid, pour order 146): 4962.5,2162.5 5175,2162.5 5175,1875 4925,1875 4925,2075 4950,2100 4950,2112.5 4937.5,2125 4900,2125 4900,2187.5 4937.5,2187.5
no net on Top Copper "CIN0_L01_P019" (solid, pour order 19): 5687.5,3975 5687.5,3250 6299.21,3250 6299.21,3975
no net on Top Copper "CIN14_L01_P018" (solid, pour order 18): 612.5,3975 612.5,3250 0,3250 0,3975
no net on Top Copper "VBAT_CON_EXT_EMI_L01_P141" (solid, pour order 141): 5225,2737.5 5412.5,2737.5 5425,2725 5425,2650 5462.5,2612.5 5462.5,2562.5 5487.5,2537.5 5487.5,2087.5 5412.5,2087.5 5412.5,2387.5 5312.5,2487.5 5225,2575
no net on Top Copper "VBAT_CON_EXT_EMI_L01_P142" (solid, pour order 142): 5225,2737.5 5212.5,2750 5212.5,2837.5 5312.5,2837.5 5412.5,2737.5
no net on Top Copper "VBAT_CON_EXT_LIM_L01_P144" (solid, pour order 144): 4800,2637.5 4837.5,2675 4975,2675 4975,2562.5 5162.5,2562.5 5175,2575 5175,2737.5 5187.5,2750 5187.5,2837.5 5100,2837.5 5012.5,2750 4800,2750 4775,2725
no net on Top Copper "CIN8_L01_P110" (solid, pour order 110): 2587.5,3975 2937.5,3975 2937.5,3250 2587.5,3250
no net on Top Copper "CIN10_L01_P043" (solid, pour order 43): 1812.5,3975 2162.5,3975 2162.5,3250 1812.5,3250
no net on Top Copper "CIN2_L01_P025" (solid, pour order 25): 4912.5,3975 5262.5,3975 5262.5,3250 4912.5,3250
no net on Top Copper "CIN4_L01_P024" (solid, pour order 24): 4137.5,3975 4487.5,3975 4487.5,3250 4137.5,3250
no net on Top Copper "CIN6_L02_P023" (solid, pour order 23): 3362.5,3975 3712.5,3975 3712.5,3250 3362.5,3250
no net on Top Copper "CIN12_L01_P020" (solid, pour order 20): 1037.5,3975 1387.5,3975 1387.5,3250 1037.5,3250
no net on Top Copper "BAL.CB_LO0_L01_P017" (solid, pour order 17): 5662.5,3975 5487.5,3975 5487.5,3250 5662.5,3250
no net on Top Copper "BAL.CB_LO2_L01_P016" (solid, pour order 16): 4887.5,3975 4712.5,3975 4712.5,3250 4887.5,3250
no net on Top Copper "BAL.CB_LO4_L01_P015" (solid, pour order 15): 4112.5,3975 3937.5,3975 3937.5,3250 4112.5,3250
no net on Top Copper "BAL.CB_LO6_L01_P014" (solid, pour order 14): 3337.5,3975 3162.5,3975 3162.5,3250 3337.5,3250
no net on Top Copper "BAL.CB_LO8_L01_P013" (solid, pour order 13): 2562.5,3975 2387.5,3975 2387.5,3250 2562.5,3250
no net on Top Copper "BAL.CB_LO10_L01_P012" (solid, pour order 12): 1787.5,3975 1612.5,3975 1612.5,3250 1787.5,3250
no net on Top Copper "BAL.CB_LO12_L01_P011" (solid, pour order 11): 1012.5,3975 837.5,3975 837.5,3250 1012.5,3250
no net on Top Copper "BAL.CB_HI2_L01_P010" (solid, pour order 10): 5287.5,3975 5462.5,3975 5462.5,3250 5287.5,3250
no net on Top Copper "BAL.CB_HI4_L01_P009" (solid, pour order 9): 4512.5,3975 4687.5,3975 4687.5,3250 4512.5,3250
no net on Top Copper "BAL.CB_HI6_L01_P008" (solid, pour order 8): 3737.5,3975 3912.5,3975 3912.5,3250 3737.5,3250
no net on Top Copper "BAL.CB_HI8_L01_P007" (solid, pour order 7): 2962.5,3975 3137.5,3975 3137.5,3250 2962.5,3250
no net on Top Copper "BAL.CB_HI10_L01_P006" (solid, pour order 6): 2187.5,3975 2362.5,3975 2362.5,3250 2187.5,3250
no net on Top Copper "BAL.CB_HI12_L01_P005" (solid, pour order 5): 1412.5,3975 1587.5,3975 1587.5,3250 1412.5,3250
no net on Top Copper "BAL.CB_HI14_L01_P004" (solid, pour order 4): 637.5,3975 812.5,3975 812.5,3250 637.5,3250
no net on GND "NONET_L05_P000" (solid, remove dead copper, pour order 0): -199.38,3250 6587.5,3250 6587.5,-125 6500,-212.5 -250,-212.5
no net on GND "CIN0_L05_P107" (solid, pour order 107): 5687.5,3975 5687.5,3250 6299.21,3250 6299.21,3975
no net on GND "CIN14_L05_P106" (solid, pour order 106): 612.5,3975 612.5,3250 0,3250 0,3975
no net on GND "CIN10_L05_P131" (solid, pour order 131): 1812.5,3975 2162.5,3975 2162.5,3250 1812.5,3250
no net on GND "BAL.CB_HI2_L05_P120" (solid, pour order 120): 5287.5,3975 5462.5,3975 5462.5,3250 5287.5,3250
no net on GND "BAL.CB_HI4_L05_P119" (solid, pour order 119): 4512.5,3975 4687.5,3975 4687.5,3250 4512.5,3250
no net on GND "BAL.CB_HI10_L05_P116" (solid, pour order 116): 2187.5,3975 2362.5,3975 2362.5,3250 2187.5,3250
no net on GND "BAL.CB_HI12_L05_P115" (solid, pour order 115): 1412.5,3975 1587.5,3975 1587.5,3250 1412.5,3250
no net on GND "BAL.CB_HI14_L05_P114" (solid, pour order 114): 637.5,3975 812.5,3975 812.5,3250 637.5,3250
no net on GND "CIN2_L05_P113" (solid, pour order 113): 4912.5,3975 5262.5,3975 5262.5,3250 4912.5,3250
no net on GND "CIN4_L05_P112" (solid, pour order 112): 4137.5,3975 4487.5,3975 4487.5,3250 4137.5,3250
no net on GND "CIN12_L05_P108" (solid, pour order 108): 1037.5,3975 1387.5,3975 1387.5,3250 1037.5,3250
no net on GND "BAL.CB_LO2_L05_P104" (solid, pour order 104): 4887.5,3975 4712.5,3975 4712.5,3250 4887.5,3250
no net on GND "BAL.CB_LO4_L05_P103" (solid, pour order 103): 4112.5,3975 3937.5,3975 3937.5,3250 4112.5,3250
no net on GND "BAL.CB_LO6_L05_P102" (solid, pour order 102): 3337.5,3975 3162.5,3975 3162.5,3250 3337.5,3250
no net on GND "BAL.CB_LO8_L05_P101" (solid, pour order 101): 2562.5,3975 2387.5,3975 2387.5,3250 2562.5,3250
no net on GND "BAL.CB_LO12_L05_P099" (solid, pour order 99): 1012.5,3975 837.5,3975 837.5,3250 1012.5,3250
no net on GND "BAL.CB_HI6_L05_P096" (solid, pour order 96): 3737.5,3975 3912.5,3975 3912.5,3250 3737.5,3250
no net on GND "BAL.CB_HI8_L05_P095" (solid, pour order 95): 2962.5,3975 3137.5,3975 3137.5,3250 2962.5,3250
no net on GND "CIN6_L05_P089" (solid, pour order 89): 3362.5,3975 3712.5,3975 3712.5,3250 3362.5,3250
no net on GND "CIN8_L05_P088" (solid, pour order 88): 2587.5,3975 2937.5,3975 2937.5,3250 2587.5,3250
no net on GND "BAL.CB_LO0_L05_P061" (solid, pour order 61): 5662.5,3975 5487.5,3975 5487.5,3250 5662.5,3250
no net on GND "BAL.CB_LO10_L05_P056" (solid, pour order 56): 1787.5,3975 1612.5,3975 1612.5,3250 1787.5,3250
no net on Supply "NONET_L02_P137" (solid, remove dead copper, pour order 137): -25,3250 6325,3250 6325,-50 -25,-50
no net on Supply "NONET_L02_P136" (solid, pour order 136): 4250,-50 4250,3250 6400,3250 6400,-50
no net on Supply "CIN0_L02_P041" (solid, pour order 41): 5687.5,3975 5687.5,3250 6299.21,3250 6299.21,3975
no net on Supply "CIN14_L02_P040" (solid, pour order 40): 612.5,3975 612.5,3250 0,3250 0,3975
no net on Supply "CIN6_L02_P023" (solid, pour order 111): 3362.5,3975 3712.5,3975 3712.5,3250 3362.5,3250
no net on Supply "BAL.CB_HI8_L02_P073" (solid, pour order 73): 2962.5,3975 3137.5,3975 3137.5,3250 2962.5,3250
no net on Supply "CIN8_L02_P044" (solid, pour order 44): 2587.5,3975 2937.5,3975 2937.5,3250 2587.5,3250
no net on Supply "CIN2_L02_P047" (solid, pour order 47): 4912.5,3975 5262.5,3975 5262.5,3250 4912.5,3250
no net on Supply "CIN4_L02_P046" (solid, pour order 46): 4137.5,3975 4487.5,3975 4487.5,3250 4137.5,3250
no net on Supply "CIN10_L02_P021" (solid, pour order 21): 1812.5,3975 2162.5,3975 2162.5,3250 1812.5,3250
no net on Supply "CIN12_L02_P042" (solid, pour order 42): 1037.5,3975 1387.5,3975 1387.5,3250 1037.5,3250
no net on Supply "BAL.CB_LO0_L02_P039" (solid, pour order 39): 5662.5,3975 5487.5,3975 5487.5,3250 5662.5,3250
no net on Supply "BAL.CB_LO2_L02_P038" (solid, pour order 38): 4887.5,3975 4712.5,3975 4712.5,3250 4887.5,3250
no net on Supply "BAL.CB_LO4_L02_P037" (solid, pour order 37): 4112.5,3975 3937.5,3975 3937.5,3250 4112.5,3250
no net on Supply "BAL.CB_LO6_L02_P036" (solid, pour order 36): 3337.5,3975 3162.5,3975 3162.5,3250 3337.5,3250
no net on Supply "BAL.CB_LO8_L02_P035" (solid, pour order 35): 2562.5,3975 2387.5,3975 2387.5,3250 2562.5,3250
no net on Supply "BAL.CB_LO10_L02_P034" (solid, pour order 34): 1787.5,3975 1612.5,3975 1612.5,3250 1787.5,3250
no net on Supply "BAL.CB_LO12_L02_P033" (solid, pour order 33): 1012.5,3975 837.5,3975 837.5,3250 1012.5,3250
no net on Supply "BAL.CB_HI2_L02_P032" (solid, pour order 32): 5287.5,3975 5462.5,3975 5462.5,3250 5287.5,3250
no net on Supply "BAL.CB_HI4_L02_P030" (solid, pour order 30): 4512.5,3975 4687.5,3975 4687.5,3250 4512.5,3250
no net on Supply "BAL.CB_HI6_L02_P031" (solid, pour order 31): 3737.5,3975 3912.5,3975 3912.5,3250 3737.5,3250
no net on Supply "BAL.CB_HI10_L02_P028" (solid, pour order 28): 2187.5,3975 2362.5,3975 2362.5,3250 2187.5,3250
no net on Supply "BAL.CB_HI12_L02_P027" (solid, pour order 27): 1412.5,3975 1587.5,3975 1587.5,3250 1412.5,3250
no net on Supply "BAL.CB_HI14_L02_P026" (solid, pour order 26): 637.5,3975 812.5,3975 812.5,3250 637.5,3250
no net on Bot Copper "CIN0_L06_P129" (solid, pour order 129): 5687.5,3975 5687.5,3250 6299.21,3250 6299.21,3975
no net on Bot Copper "CIN14_L06_P128" (solid, pour order 128): 612.5,3975 612.5,3250 0,3250 0,3975
no net on Bot Copper "BAL.CB_HI6_L06_P118" (solid, pour order 118): 3737.5,3975 3912.5,3975 3912.5,3250 3737.5,3250
no net on Bot Copper "BAL.CB_HI2_L06_P098" (solid, pour order 98): 5287.5,3975 5462.5,3975 5462.5,3250 5287.5,3250
no net on Bot Copper "BAL.CB_HI10_L06_P094" (solid, pour order 94): 2187.5,3975 2362.5,3975 2362.5,3250 2187.5,3250
no net on Bot Copper "BAL.CB_HI12_L06_P093" (solid, pour order 93): 1412.5,3975 1587.5,3975 1587.5,3250 1412.5,3250
no net on Bot Copper "CIN10_L06_P087" (solid, pour order 87): 1812.5,3975 2162.5,3975 2162.5,3250 1812.5,3250
no net on Bot Copper "BAL.CB_HI4_L06_P053" (solid, pour order 53): 4512.5,3975 4687.5,3975 4687.5,3250 4512.5,3250
no net on Bot Copper "BAL.CB_HI8_L06_P051" (solid, pour order 51): 2962.5,3975 3137.5,3975 3137.5,3250 2962.5,3250
no net on Bot Copper "BAL.CB_HI14_L06_P048" (solid, pour order 48): 637.5,3975 812.5,3975 812.5,3250 637.5,3250
no net on Bot Copper "CIN8_L06_P066" (solid, pour order 66): 2587.5,3975 2937.5,3975 2937.5,3250 2587.5,3250
no net on Bot Copper "CIN2_L06_P135" (solid, pour order 135): 4912.5,3975 5262.5,3975 5262.5,3250 4912.5,3250
no net on Bot Copper "CIN4_L06_P134" (solid, pour order 134): 4137.5,3975 4487.5,3975 4487.5,3250 4137.5,3250
no net on Bot Copper "CIN6_L06_P133" (solid, pour order 133): 3362.5,3975 3712.5,3975 3712.5,3250 3362.5,3250
no net on Bot Copper "CIN12_L06_P130" (solid, pour order 130): 1037.5,3975 1387.5,3975 1387.5,3250 1037.5,3250
no net on Bot Copper "BAL.CB_LO0_L06_P127" (solid, pour order 127): 5662.5,3975 5487.5,3975 5487.5,3250 5662.5,3250
no net on Bot Copper "BAL.CB_LO2_L06_P126" (solid, pour order 126): 4887.5,3975 4712.5,3975 4712.5,3250 4887.5,3250
no net on Bot Copper "BAL.CB_LO4_L06_P125" (solid, pour order 125): 4112.5,3975 3937.5,3975 3937.5,3250 4112.5,3250
no net on Bot Copper "BAL.CB_LO6_L06_P124" (solid, pour order 124): 3337.5,3975 3162.5,3975 3162.5,3250 3337.5,3250
no net on Bot Copper "BAL.CB_LO8_L06_P123" (solid, pour order 123): 2562.5,3975 2387.5,3975 2387.5,3250 2562.5,3250
no net on Bot Copper "BAL.CB_LO10_L06_P122" (solid, pour order 122): 1787.5,3975 1612.5,3975 1612.5,3250 1787.5,3250
no net on Bot Copper "BAL.CB_LO12_L06_P121" (solid, pour order 121): 1012.5,3975 837.5,3975 837.5,3250 1012.5,3250
no net on Signal Layer 1 "CIN0_L03_P063" (solid, pour order 63): 5687.5,3975 5687.5,3250 6299.21,3250 6299.21,3975
no net on Signal Layer 1 "CIN14_L03_P062" (solid, pour order 62): 612.5,3975 612.5,3250 0,3250 0,3975